# Altium PCB Visual_acqusation.PcbDoc
Units mm, origin at the board's own origin, x right, y up, seen from the top; angles counter-clockwise.
Board outline 40 x 40 mm, 2 copper layers (Top Layer, Bottom Layer), stack 1.671 mm thick; 53 components, 28 nets, 154 pads, 39 vias.
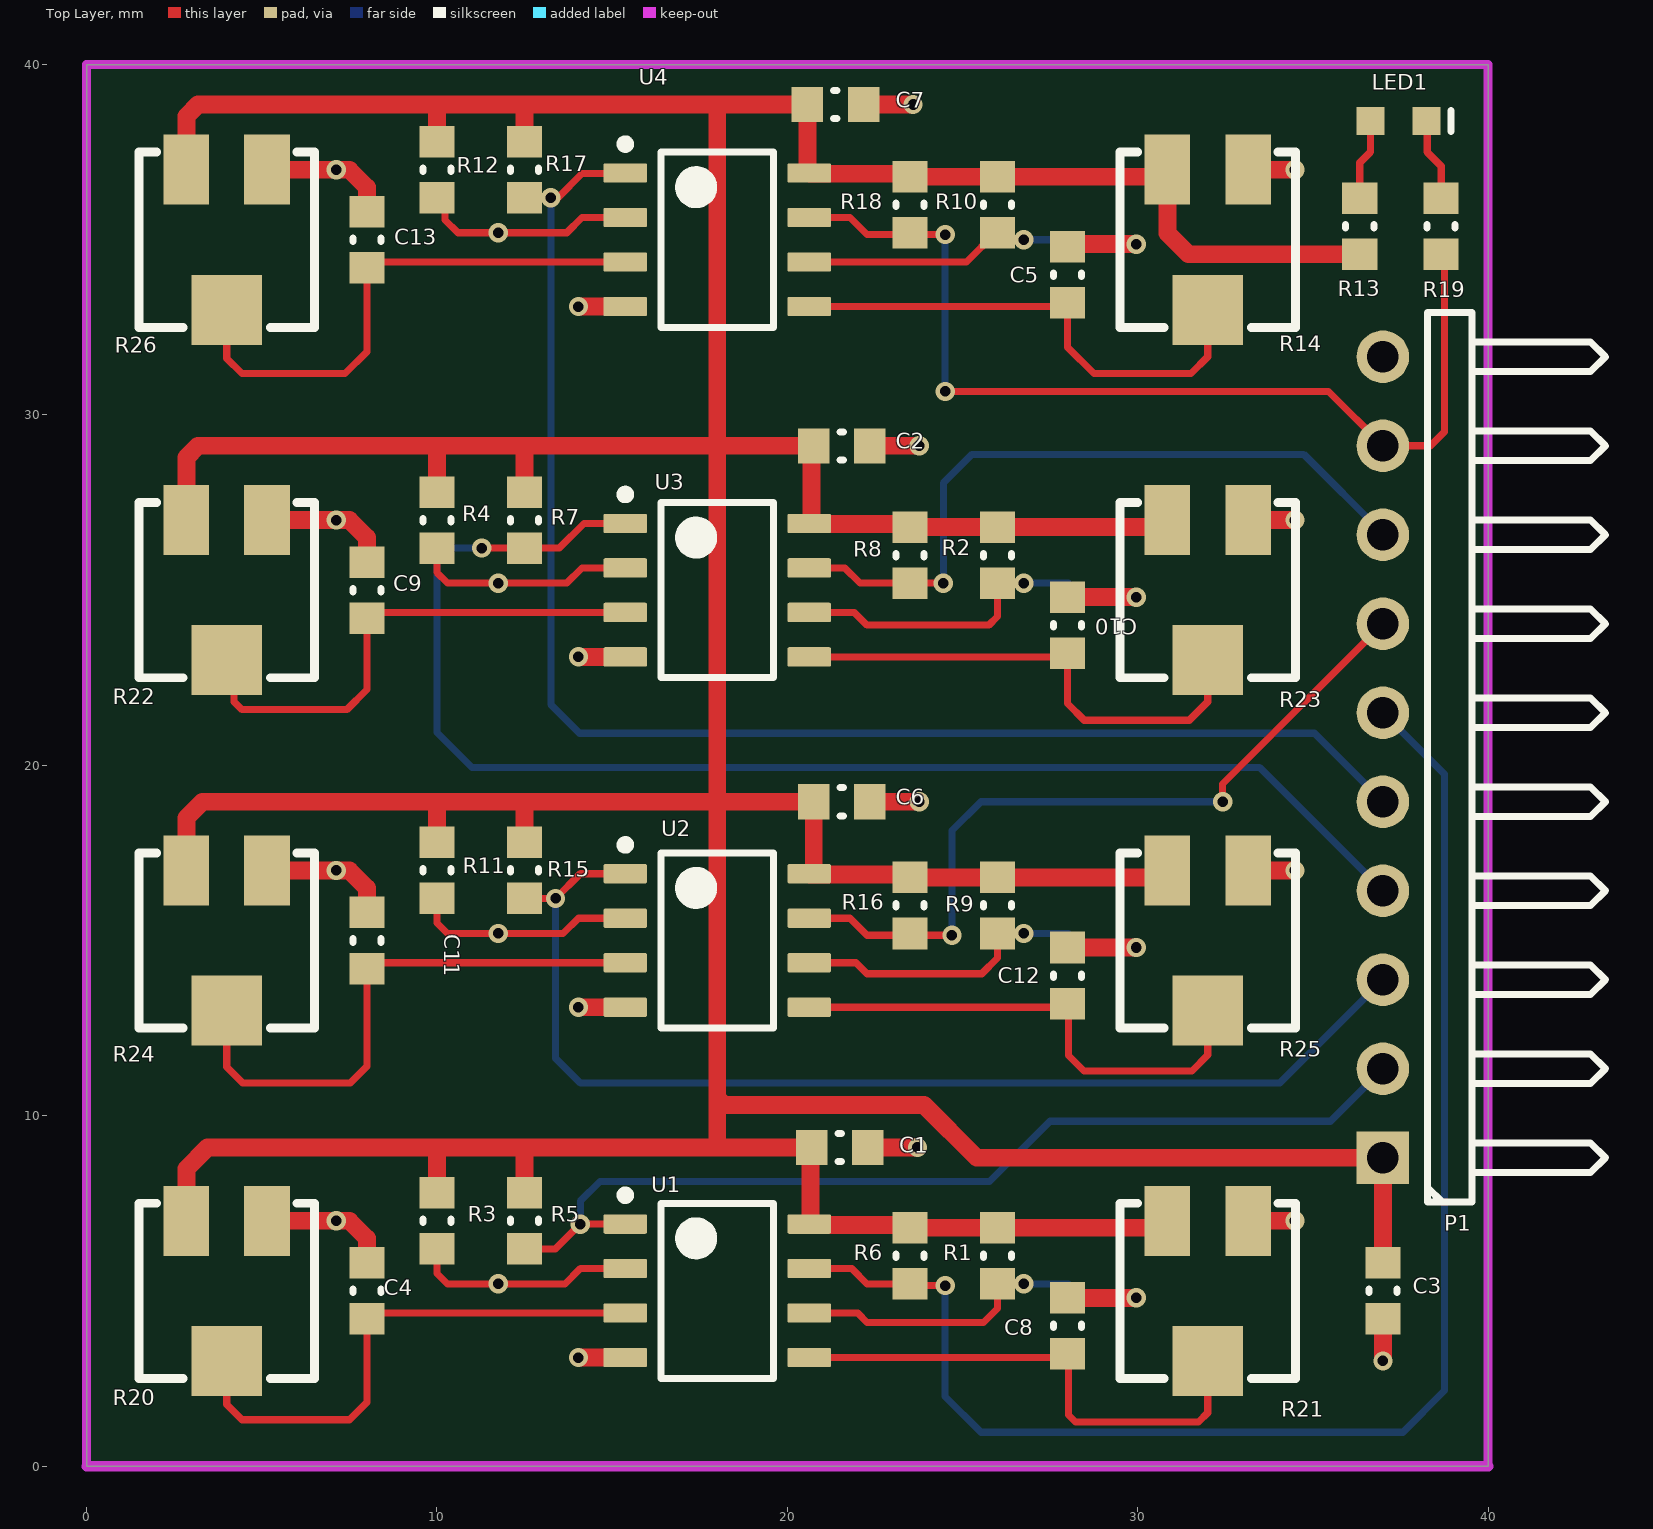
[diagram p0: Top Layer view]
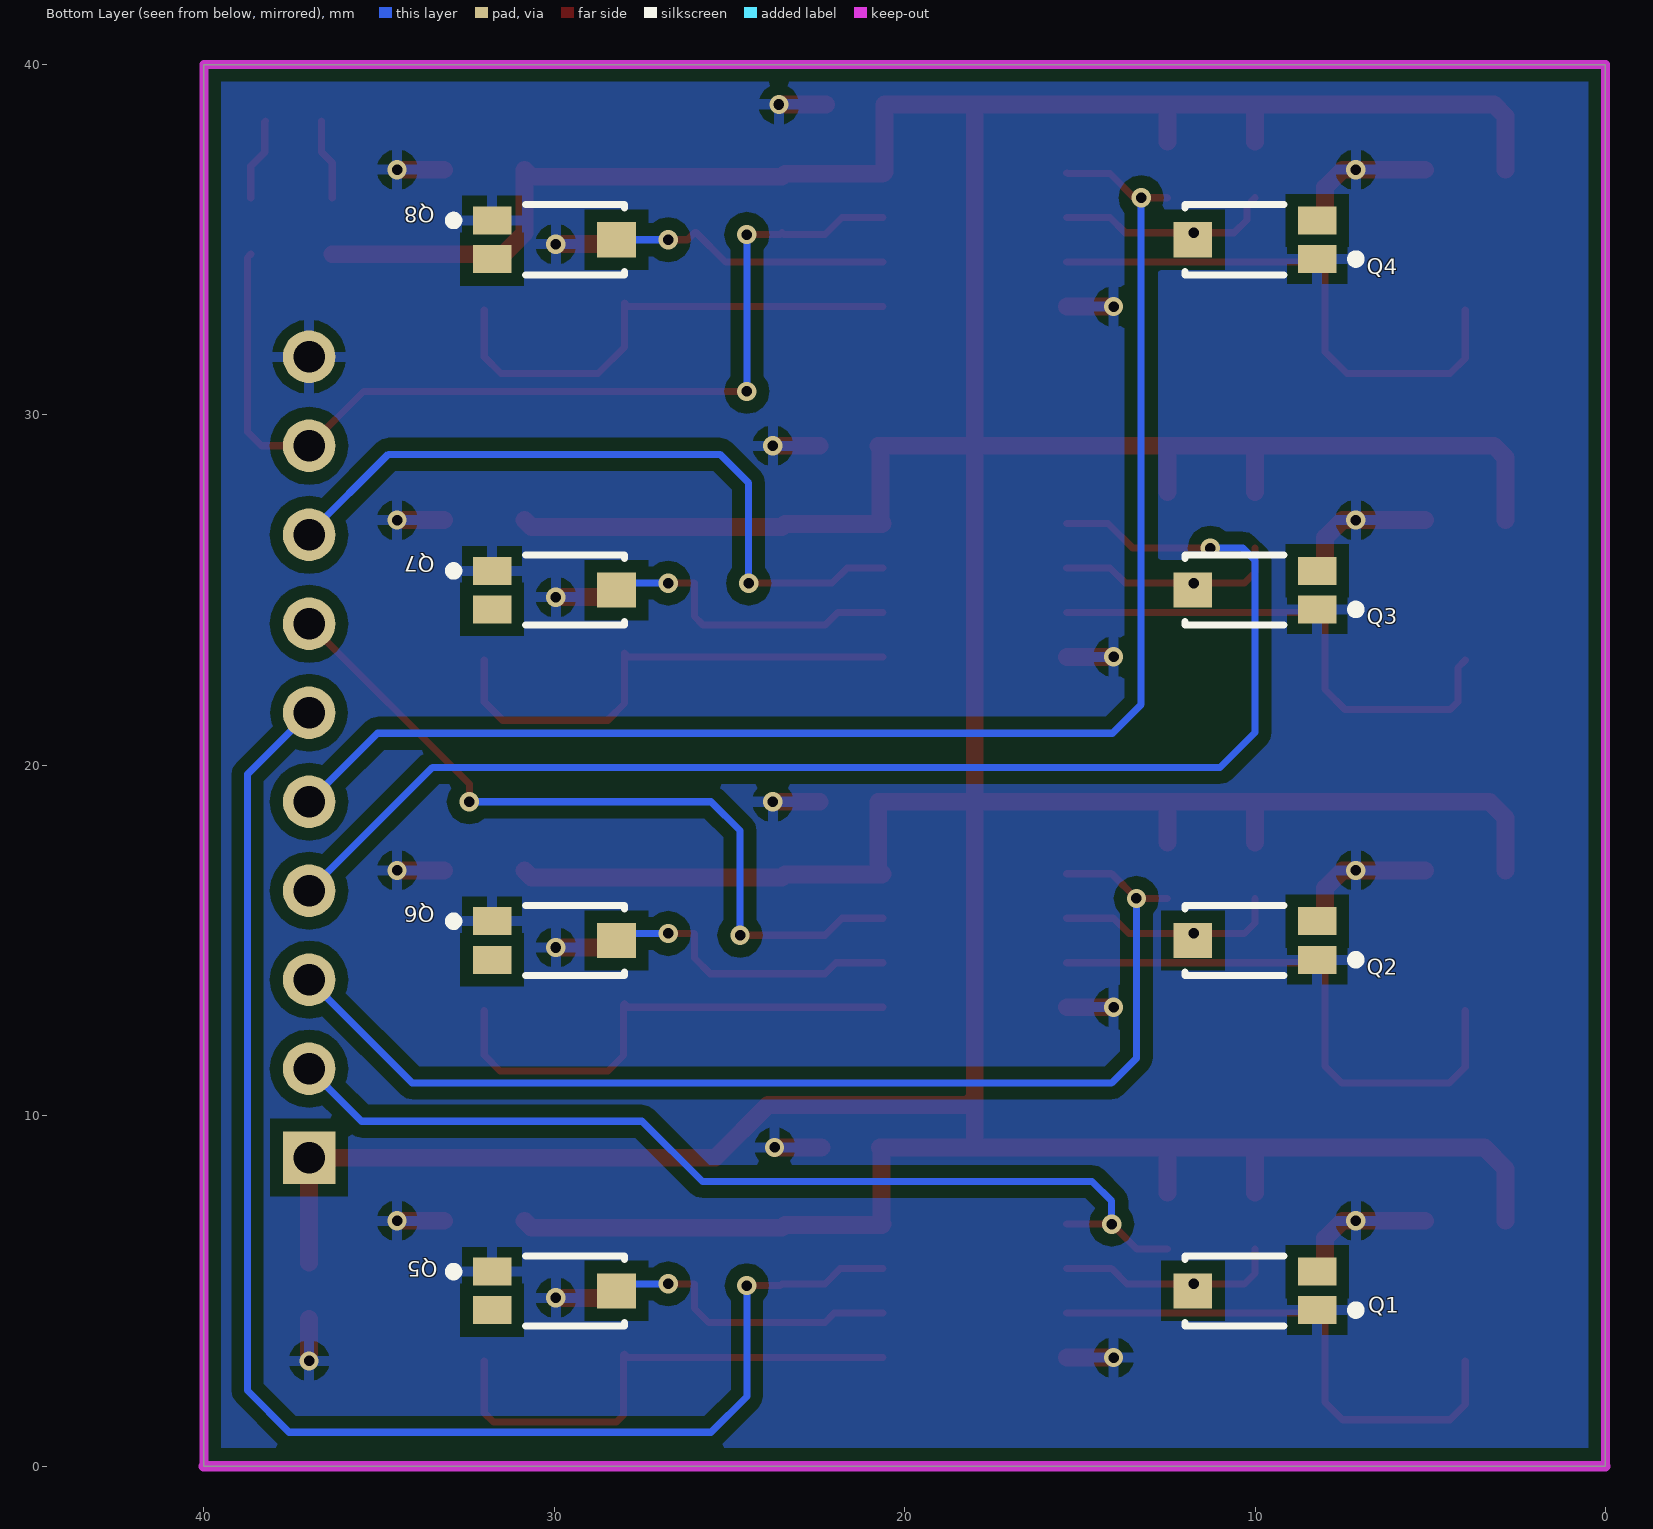
[diagram p1: Bottom Layer view, seen from below]

## Layer stack, top to bottom
Top Solder: solder mask 0.0102, Solder Resist, Dk 3.5
Top Layer: signal copper 0.0356
Dielectric1: core 1.6, FR-4, Dk 4.8
Bottom Layer: signal copper 0.0356
Bottom Solder: solder mask 0.0102, Solder Resist, Dk 3.5

## Board outline
0,0 40,0 40,40 0,40

## Design rules (kind name [scope] priority, off if disabled: settings)
Clearance Clearance_1 [InPolygon] p1: gap=0.356 ignorepadtopadclearanceinfootprint=FALSE except(0: Arc-Hole Track-Hole SMDPad-Hole THPad-Hole Via-Hole Fill-Hole Poly-Hole Region-Hole Text-Hole)
Clearance [All] p2: gap=0.152 ignorepadtopadclearanceinfootprint=FALSE except(0: Arc-Hole Track-Hole SMDPad-Hole THPad-Hole Via-Hole Fill-Hole Poly-Hole Region-Hole Text-Hole)
FabricationTestPointUsage TestPointUsage [All] p1: valid=0 allowmultiple=FALSE
FabricationTestpoint Testpoint [(IsPad And (OnTopLayer Or OnBottomLayer))] p1: side=3 testpointundercomponent=TRUE minsize=1.016 maxsize=2.54 preferedsize=1.524 minholesize=0 maxholesize=1.016 preferedholesize=0.813 testpointgrid=0.025 allowsidetop=TRUE allowsidebottom=TRUE usegrid=TRUE gridtolerance=0
HoleSize [All] p1: absolutevalues=TRUE maxlimit=20 minlimit=0.3 maxpercent=80.000 minpercent=20.000
HoleToHoleClearance [All] p1: gap=0 allowstackedmicrovias=TRUE
MinimumSolderMaskSliver [All] p1: minsoldermaskwidth=0
PlaneClearance [All] p1: clearance=0.4
PlaneConnect [All] p1: planeconnectstyle=Direct reliefexpansion=0.3 reliefentries=4 reliefconductorwidth=0.3 reliefairgap=0.3
PolygonConnect [All] p1: connectstyle=Relief reliefconductorwidth=0.3 reliefentries=4 polygonreliefangle="90 Angle" airgapwidth=0.3
RoomDefinition Detector [InComponentClass('Detector')] p1: confinementstyle=ConfineIn formatcopy=TRUE lockcomponents=FALSE outline -105.241,-83.793 -54.441,-83.793 -54.441,-58.393 -105.241,-58.393
RoutingVias [All] p1: holewidth=0.5 width=1.3 viastyle="Through Hole" minholewidth=0.3 minwidth=0.5 maxholewidth=10 maxwidth=20
SilkToSilkClearance [All] p1: silktosilkclearance=0
SilkToSolderMaskClearance SilkscreenOverComponentPads [IsPad] p1: minsilkscreentomaskgap=0 clearancetoexposedcopper=TRUE
SolderMaskExpansion [All] p1: expansion=0.102 istentingtop=FALSE
Width [All] p1: maxlimit=5.08 minlimit=0.152 preferedwidth=0.254
21 further rules are at their usual default settings.

## Components (designator, comment, footprint, x,y, rotation, side; value= is the part's Value field where it differs from the comment)
C1 "CAP 100nF 6.3V" CAPC0603(1608)100_N 21.502,9.092 r180 top value=100nF
C2 "CAP 100nF 6.3V" CAPC0603(1608)100_N 21.552,29.12 r180 top value=100nF
C3 "CAP 100nF 6.3V" CAPC0603(1608)100_N 37,5 r90 top value=100nF
C4 "CAP 100nF 6.3V" CAPC0603(1608)100_N 8,5 r270 top value=100nF
C5 "CAP 100nF 6.3V" CAPC0603(1608)100_N 28,34 r270 top value=100nF
C6 "CAP 100nF 6.3V" CAPC0603(1608)100_N 21.552,18.96 r180 top value=100nF
C7 "CAP 100nF 6.3V" CAPC0603(1608)100_N 21.375,38.861 r180 top value=100nF
C8 "CAP 100nF 6.3V" CAPC0603(1608)100_N 28,4 r270 top value=100nF
C9 "CAP 100nF 6.3V" CAPC0603(1608)100_N 8,25 r270 top value=100nF
C10 "CAP 100nF 6.3V" CAPC0603(1608)100_N 28,24 r270 top locked value=100nF
C11 "CAP 100nF 6.3V" CAPC0603(1608)100_N 8,15 r270 top value=100nF
C12 "CAP 100nF 6.3V" CAPC0603(1608)100_N 28,14 r270 top value=100nF
C13 "CAP 100nF 6.3V" CAPC0603(1608)100_N 8,35 r270 top value=100nF
LED1 "150060BS75000" 0603_A 37.44,38.386 r180 top
P1 "Header 10H" HDR1X10H 37,8.8 r90 top locked
Q1 "TEMT6000X01" VSIL-TEMT6000X01_V 10,5 r0 bottom locked
Q2 "TEMT6000X01" VSIL-TEMT6000X01_V 10,15 r0 bottom locked
Q3 "TEMT6000X01" VSIL-TEMT6000X01_V 10,25 r0 bottom locked
Q4 "TEMT6000X01" VSIL-TEMT6000X01_V 10,35 r0 bottom locked
Q5 "TEMT6000X01" VSIL-TEMT6000X01_V 30,5 r180 bottom
Q6 "TEMT6000X01" VSIL-TEMT6000X01_V 30,15 r180 bottom
Q7 "TEMT6000X01" VSIL-TEMT6000X01_V 30,25 r180 bottom locked
Q8 "TEMT6000X01" VSIL-TEMT6000X01_V 30,35 r180 bottom
R1 "10K 1% 0603(1608)" RESC0603(1608)_N 26,6 r90 top value="10000.00 Ohm"
R2 "10K 1% 0603(1608)" RESC0603(1608)_N 26,26 r90 top value="10000.00 Ohm"
R3 "10K 1% 0603(1608)" RESC0603(1608)_N 10,7 r90 top value="10000.00 Ohm"
R4 "10K 1% 0603(1608)" RESC0603(1608)_N 10,27 r90 top value="10000.00 Ohm"
R5 "1K 1% 0603(1608)" RESC0603(1608)_N 12.5,7 r90 top value="3300.00 Ohm"
R6 "3K3 1% 0603(1608)" RESC0603(1608)_N 23.5,6 r90 top value="3300.00 Ohm"
R7 "1K 1% 0603(1608)" RESC0603(1608)_N 12.5,27 r90 top value="3300.00 Ohm"
R8 "3K3 1% 0603(1608)" RESC0603(1608)_N 23.5,26 r90 top value="3300.00 Ohm"
R9 "10K 1% 0603(1608)" RESC0603(1608)_N 26,16 r90 top value="10000.00 Ohm"
R10 "10K 1% 0603(1608)" RESC0603(1608)_N 26,36 r90 top value="10000.00 Ohm"
R11 "10K 1% 0603(1608)" RESC0603(1608)_N 10,17 r90 top value="10000.00 Ohm"
R12 "10K 1% 0603(1608)" RESC0603(1608)_N 10,37 r90 top value="10000.00 Ohm"
R13 "1K 1%" RESC0603(1608)_N 36.338,35.388 r270 top value="1000.00 Ohm"
R14 "RPot SM" POT4MM-2 32,35 r270 top
R15 "1K 1% 0603(1608)" RESC0603(1608)_N 12.5,17 r90 top value="3300.00 Ohm"
R16 "3K3 1% 0603(1608)" RESC0603(1608)_N 23.5,16 r90 top value="3300.00 Ohm"
R17 "1K 1% 0603(1608)" RESC0603(1608)_N 12.5,37 r90 top value="3300.00 Ohm"
R18 "3K3 1% 0603(1608)" RESC0603(1608)_N 23.5,36 r90 top value="3300.00 Ohm"
R19 "0" RESC0603(1608)_N 38.664,35.388 r90 top value="1000.00 Ohm"
R20 "RPot SM" POT4MM-2 4,5 r270 top
R21 "RPot SM" POT4MM-2 32,5 r270 top
R22 "RPot SM" POT4MM-2 4,25 r270 top
R23 "RPot SM" POT4MM-2 32,25 r270 top
R24 "RPot SM" POT4MM-2 4,15 r270 top
R25 "RPot SM" POT4MM-2 32,15 r270 top
R26 "RPot SM" POT4MM-2 4,35 r270 top
U1 "LM393M" D0008A_L 18,5 r0 top
U2 "LM393M" D0008A_L 18,15 r0 top locked
U3 "LM393M" D0008A_L 18,25 r0 top locked
U4 "LM393M" D0008A_L 18,35 r0 top locked

## Footprints (in the part's own frame and the unit in brackets; to place one, negate y for a bottom-side part, rotate by r counter-clockwise, add the part's x,y. Pads: shape width x height; smd on the part's side, far side on the other; paste and mask are expansions set on the pad)
0603_A [mm] "Chip LED, 2-Leads, Body 1.6x0.8mm, IPC Medium Density"
  rect 0.8x0.8 smd: 1(-0.8,0) 2(0.8,0)
  silkscreen extent -1.5,-0.3 -1.5,0.3, body extent -0.8,-0.4 0.8,0.4, height 0.7
CAPC0603(1608)100_N [mm] "Chip Capacitor, Body 1.6x0.8mm, Height 1.0mm, IPC Medium Density"
  rect 0.9x1 smd: 1(-0.8,0) 2(0.8,0)
  silkscreen extent -0.05,-0.4 0.05,0.4, body extent -0.87,-0.48 0.88,0.47, height 1
D0008A_L [mm] "SOIC, 8-Leads, Body 5x4mm, Pitch 1.27mm, IPC High Density"
  rrect18% 1.25x0.55 smd: 1(-2.625,1.905) 2(-2.625,0.635) 3(-2.625,-0.635) 4(-2.625,-1.905) 5(2.625,-1.905) 6(2.625,-0.635) 7(2.625,0.635) 8(2.625,1.905)
  silkscreen extent -2.75,-2.5 1.6,2.85, body extent -3,-2.45 3,2.45, height 1.63
HDR1X10H [mm] "Connector; Header; 10 Position; Right Angle"
  rect 1.5x1.5 hole 0.9: 1(0,0)
  round 1.5 hole 0.9: 2(2.54,0) 3(5.08,0) 4(7.62,0) 5(10.16,0) 6(12.7,0) 7(15.24,0) 8(17.78,0) 9(20.32,0) 10(22.86,0)
  silkscreen extent -1.27,-6.35 24.13,-1.27
POT4MM-2 [mm] "Square Trimming Potentiometer"
  rect 2x1.3 smd: CCW(-2,-1.15) CW(-2,1.15)
  rect 2x2 smd: W(2,0)
  silkscreen extent -2.5,-2.5 2.5,2.5
RESC0603(1608)_N [mm] "Chip Resistor, Body 1.6x0.8mm, IPC Medium Density"
  rect 0.9x1 smd: 1(-0.8,0) 2(0.8,0)
  silkscreen extent -0.05,-0.4 0.05,0.4, body extent -0.85,-0.47 0.85,0.47, height 0.6
VSIL-TEMT6000X01_V [mm] "SMD, 3-Leads, Body 4x2mm"
  rect 1.1x0.8 smd: 1(-1.775,0.55) 2(-1.775,-0.55)
  rect 1.1x1 smd: 3(1.775,0)
  silkscreen extent -3,-1 2,1, body extent -2,-1 2,1, height 1.05

## Part data
C1 C2 C3 C4 C5 C6 C7 C8 C9 C10 C11 C12 C13: library part CMP-1035-02576-1, "CAP 100nF 6.3V ±10% 0603 (1608 Metric) Thickness 1mm SMD", Case-EIA=0603, Case-Metric=1608, Rated Voltage="6.3 V", Tolerance=Â±10%, Max Thickness="1 mm", Technology=SMT
LED1: library part CMP-1426-00003-1, "SMD mono-color Chip LED, WL-SMCW, Blue", Color=Blue, Manufacturer="Wuerth Elektronik", ComponentLink1Description="Manufacturer URL", ComponentLink1URL=http://www.we-online.com, ComponentLink2Description=Datasheet, ComponentLink2URL=http://katalog.we-online.com/led/datasheet/150060BS75000.pdf, PackageReference=0603_A, PartNumber=150060BS75000
P1: "Header, 10-Pin, Right Angle", LatestRevisionDate=17-Jul-2002, LatestRevisionNote="Re-released for DXP Platform.", Publisher="Altium Limited"
Q1 Q2 Q3 Q5 Q6 Q7 Q8: library part CMP-1666-00035-1, "Ambient Light Sensor / , 100 mW, -40 to 100 degC, 3-Pin SMD, RoHS, Tape and Reel", Case Code (Imperial)=0603, Case Code (Metric)=1608, Colour=Red, Forward Current="20 mA", Forward Voltage="2 V", Max Operating Temperature="85 degC", Min Operating Temperature="-55 degC", Package Quantity=3000, Power Rating="75 mW", Case\Package=0603, ComponentLink1Description="Manufacturer URL", ComponentLink1URL=http://www.vishay.com/, ComponentLink2Description=Datasheet, ComponentLink2URL=http://www.vishay.com/docs/81579/temt6000.pdf, DatasheetVersion="Rev. 1.9, 08/2011", Height="0.8 mm", Illumination Colour=Red, Length="1.6 mm", Lens Style=Diffused, Luminous Intensity="54 mcd", Mount="Surface Mount", Nominal Vf="2 V", PackageDescription="3-Pin Surface Mount Device, Body 4 x 2 mm", PackageReference=1206, Packaging="Tape and Reel", Pins=2, Radiation Hardening=No, RoHSCompliant=true, Viewing Angle="130 degrees", Width="0.8 mm"
Q4: library part CMP-1666-00035-1, "Ambient Light Sensor / , 100 mW, -40 to 100 degC, 3-Pin SMD, RoHS, Tape and Reel", Case\Package=0603, Case Code (Metric)=1608, Colour=Red, Forward Current="20 mA", Forward Voltage="2 V", Max Operating Temperature="85 degC", Min Operating Temperature="-55 degC", Package Quantity=3000, Power Rating="75 mW", Case Code (Imperial)=0603, ComponentLink1Description="Manufacturer URL", ComponentLink1URL=http://www.vishay.com/, ComponentLink2Description=Datasheet, ComponentLink2URL=http://www.vishay.com/docs/81579/temt6000.pdf, DatasheetVersion="Rev. 1.9, 08/2011", Height="0.8 mm", Illumination Colour=Red, Length="1.6 mm", Lens Style=Diffused, Luminous Intensity="54 mcd", Mount="Surface Mount", Nominal Vf="2 V", PackageDescription="3-Pin Surface Mount Device, Body 4 x 2 mm", PackageReference=1206, Packaging="Tape and Reel", Pins=2, Radiation Hardening=No, RoHSCompliant=true, Viewing Angle="130 degrees", Width="0.8 mm"
R1 R2 R3 R4 R9 R10 R11 R12: library part CMP-1012-00623-1, "10K 0.1W 1% 0603 (1608 Metric)  SMD", Case-EIA=0603, Case-Metric=1608, Power="0.1 W", Tolerance="1 %", Technology=SMT
R5 R6 R7 R8 R15 R16 R17 R18: library part CMP-1012-00567-1, "3K3 0.1W 1% 0603 (1608 Metric)  SMD", Case-EIA=0603, Case-Metric=1608, Power="0.1 W", Tolerance="1 %", Technology=SMT
R13 R19: library part CMP-1012-00510-1, "1K 0.1W 1% 0603 (1608 Metric)  SMD", Case-EIA=0603, Case-Metric=1608, Power="0.1 W", Tolerance="1 %", Technology=SMT
R14 R20 R21 R22 R23 R24 R25 R26: "Square Trimming Potentiometer", ComponentLink1Description="Manufacturer Link", ComponentLink1URL=http://bourns.com/2/search.html, DatasheetVersion=Oct-2003, PackageDescription="Square Trimming Potentiometer", PackageReference=POT4MM-2, Published=17-Dec-2003, Publisher="Altium Limited"
U1 U2 U3 U4: library part CMP-0055-00682-3, "Low Power Low Offset Voltage Dual Comparator, 8-pin Narrow SOIC", Manufacturer="Texas Instruments", Package Reference=D0008A, PackageTopMarking=NSZXTT*LM*393M, PowerWise=N, Code_IPC=SOIC127P600-8, Code_JEDEC=MS-012-AA, ComponentLink1Description="Datasheet URL", ComponentLink1URL=http://www.ti.com/general/docs/lit/getliterature.tsp?genericPartNumber=LM393-N&fileType=pdf, CompType=Amplifiers, PackageDescription="SOIC Narrow, 4.9 x 3.9 x 1.45mm, 8 Lead, 1.27mm Pitch", PinCount=8, RoHS=N

## Via types
v1: diameter 0.55, hole 0.3, Top Layer to Bottom Layer, tented both sides, 39 vias

## Nets (pads, with @x,y where several pads share a name; then routed paths per layer and width w, separated by ;. In a path a pad name is that pad's centre, name@x,y a point inside that pad or via, vN(x,y) a via of type N, cw(c..) or ccw(c..) an arc to the next point about the centre after c; other vN are vias at no path point)
+5: C1.2 C2.2 C3.2 C6.2 C7.2 P1.1 R1.2 R2.2 R3.2 R4.2 R5.2 R6.2 R7.2 R8.2 R9.2 R10.2 R11.2 R12.2 R13.2 R14.CCW R15.2 R16.2 R17.2 R18.2 R20.CCW R21.CCW R22.CCW R23.CCW R24.CCW R25.CCW R26.CCW U1.8 U2.8 U3.8 U4.8 | length 198.2
  Top Layer w0.508: R20.CCW 2.85,8.488 3.454,9.092 10,9.092 ; R24.CCW 2.85,18.5 3.31,18.96 10,18.96 ; R22.CCW 2.85,28.788 3.182,29.12 10,29.12 ; R26.CCW 2.85,38.528 3.182,38.861 10,38.861 ; R3.2 10,9.092 ; R11.2 10,18.96 ; R4.2 10,29.12 ; R12.2 10,38.861 ; R5.2 12.5,9.092 ; R15.2 12.5,18.96 ; R7.2 12.5,29.12 ; R17.2 12.5,38.861 ; R21.CCW 30.65,6.8 R1.2 R6.2 23.416,6.884 20.646,6.884 U1.8 20.642,6.905 20.663,6.926 20.663,9.054 C1.2 18,9.092 ; R25.CCW 30.65,16.8 R9.2 R16.2 23.416,16.884 20.646,16.884 U2.8 20.731,16.905 20.752,16.926 C6.2 18,18.96 ; R23.CCW 30.65,26.8 R2.2 R8.2 23.416,26.884 20.646,26.884 U3.8 20.667,26.905 20.688,26.926 20.688,29.057 C2.2 18,29.12 ; R13.2 31.448,34.588 30.85,35.186 R14.CCW 30.65,36.8 R10.2 R18.2 23.416,36.884 20.646,36.884 U4.8 20.596,36.905 20.575,36.926 C7.2 18,38.861 ; C3.2 P1.1 25.405,8.8 23.9,10.305 18.201,10.305 18,10.505 ; 10,9.092 12.5,9.092 ; 10,18.96 12.5,18.96 ; 10,29.12 12.5,29.12 ; 10,38.861 12.5,38.861 ; 12.5,9.092 18,9.092 ; 12.5,18.96 18,18.96 ; 12.5,29.12 18,29.12 ; 12.5,38.861 18,38.861 ; 18,9.092 18,10.505 ; 18,10.505 18,18.96 ; 18,18.96 18,29.12 ; 18,29.12 18,38.861
GND: C1.1 C2.1 C3.1 C4.1 C5.1 C6.1 C7.1 C8.1 C9.1 C10.1 C11.1 C12.1 C13.1 P1.10 Q1.1 Q2.1 Q3.1 Q4.1 Q5.1 Q6.1 Q7.1 Q8.1 R14.CW R20.CW R21.CW R22.CW R23.CW R24.CW R25.CW R26.CW U1.4 U2.4 U3.4 U4.4 | length 40.1
  Top Layer w0.508: R20.CW 7.5,7 8,6.5 C4.1 ; R24.CW 7.5,17 8,16.5 C11.1 ; R22.CW 7.5,27 8,26.5 C9.1 ; R26.CW 7.5,37 8,36.5 C13.1 ; v1(14.037,3.095) U1.4 ; v1(14.037,13.095) U2.4 ; v1(14.037,23.095) U3.4 ; v1(14.037,33.095) U4.4 ; C7.1@22.25,38.861 v1(23.588,38.861) ; C1.1@22.377,9.092 v1(23.715,9.092) ; C6.1@22.427,18.96 v1(23.765,18.96) ; C2.1@22.427,29.12 v1(23.765,29.12) ; C8.1 v1(29.956,4.8) ; C12.1 v1(29.956,14.8) ; C10.1 v1(29.956,24.8) ; C5.1 28.075,34.875 v1(29.956,34.875) ; R21.CW v1(34.488,7) ; R25.CW v1(34.488,17) ; R23.CW v1(34.488,27) ; R14.CW v1(34.488,37) ; v1(37,3) C3.1
  other v1: 7.125,7 7.125,17 7.125,27 7.125,37
LED: P1.9 R18.1 R19.1 U4.7 | length 28.8
  Top Layer w0.203: U4.7 21.79,35.635 22.275,35.15 23.45,35.15 R18.1 23.55,35.15 v1(24.504,35.15) ; v1(24.504,30.672) 35.448,30.672 P1.9 38.355,29.12 38.755,29.52 38.755,34.496 R19.1
  Bottom Layer w0.203: v1(24.504,30.672) v1(24.504,35.15)
NetC4_2: C4.2 R20.W U1.3 | length 15.5
  Top Layer w0.203: R20.W 4,1.754 4.431,1.323 7.504,1.323 8,1.819 C4.2 8.165,4.365 U1.3
NetC5_2: C5.2 R14.W U4.5 | length 14.5
  Top Layer w0.203: U4.5 27.895,33.095 C5.2 28,31.931 28.75,31.181 31.521,31.181 32,31.66 R14.W
NetC8_2: C8.2 R21.W U1.5 | length 14.8
  Top Layer w0.203: U1.5 27.895,3.095 C8.2 28.025,3.175 28.025,1.455 28.225,1.255 31.734,1.255 32,1.521 R21.W
NetC9_2: C9.2 R22.W U3.3 | length 14.9
  Top Layer w0.203: R22.W 4.205,22.795 4.205,21.814 4.431,21.588 7.426,21.588 8,22.163 C9.2 8.165,24.365 U3.3
NetC10_2: C10.2 R23.W U3.5 | length 14.5
  Top Layer w0.203: U3.5 27.895,23.095 C10.2 28,21.763 28.475,21.288 31.474,21.288 32,21.814 R23.W
NetC11_2: C11.2 R24.W U2.3 | length 16.2
  Top Layer w0.203: R24.W 4,11.392 4.457,10.935 7.524,10.935 8,11.411 C11.2 8.165,14.365 U2.3
NetC12_2: C12.2 R25.W U2.5 | length 14.5
  Top Layer w0.203: U2.5 27.895,13.095 C12.2 28.025,13.175 28.025,11.718 28.465,11.279 31.55,11.279 32,11.729 R25.W
NetC13_2: C13.2 R26.W U4.3 | length 15.7
  Top Layer w0.203: R26.W 4,31.612 4.431,31.181 7.378,31.181 8,31.803 C13.2 8.165,34.365 U4.3
NetLED1_1: LED1.1 R19.2 | length 2.4
  Top Layer w0.203: LED1.1 38.264,38.362 38.264,37.5 38.664,37.1 R19.2
NetLED1_2: LED1.2 R13.1 | length 2.3
  Top Layer w0.203: R13.1 36.338,37.198 36.64,37.5 LED1.2
NetP1_2: P1.2 R5.1 U1.1 | length 28.3
  Top Layer w0.203: R5.1 13.387,6.2 v1(14.092,6.905) U1.1
  Bottom Layer w0.203: v1(14.092,6.905) 14.092,7.563 14.65,8.121 25.773,8.121 27.494,9.842 35.502,9.842 P1.2
NetP1_3: P1.3 R15.1 U2.1 | length 32.9
  Top Layer w0.203: R15.1 v1(13.387,16.2) 14.092,16.905 U2.1
  Bottom Layer w0.203: v1(13.387,16.2) 13.387,11.64 14.092,10.935 34.055,10.935 P1.3
NetP1_4: P1.4 R7.1 U3.1 | length 39.6
  Top Layer w0.203: v1(11.275,26.2) R7.1 13.49,26.2 14.195,26.905 U3.1
  Bottom Layer w0.203: v1(11.275,26.2) 10.351,26.2 10,25.849 10,20.935 10.997,19.938 33.482,19.938 P1.4
NetP1_5: P1.5 R17.1 U4.1 | length 42.5
  Top Layer w0.203: R17.1 v1(13.25,36.2) 13.452,36.2 14.14,36.888 15.358,36.888 U4.1
  Bottom Layer w0.203: v1(13.25,36.2) 13.25,21.737 14.073,20.914 35.046,20.914 P1.5
NetP1_6: P1.6 R6.1 U1.7 | length 42.5
  Top Layer w0.203: U1.7 21.84,5.635 22.275,5.2 R6.1 23.55,5.15 v1(24.504,5.15)
  Bottom Layer w0.203: v1(24.504,5.15) 24.504,1.986 25.525,0.965 37.569,0.965 38.755,2.152 38.755,19.745 P1.6
NetP1_7: P1.7 R16.1 U2.7 | length 22.3
  Top Layer w0.203: U2.7 21.79,15.635 22.275,15.15 v1(24.7,15.15) ; v1(32.425,18.96) 32.425,19.465 P1.7
  Bottom Layer w0.203: v1(24.7,15.15) 24.7,18.135 25.525,18.96 v1(32.425,18.96)
NetP1_8: P1.8 R8.1 U3.7 | length 20.7
  Top Layer w0.203: U3.7 21.642,25.635 22.077,25.2 R8.1 v1(24.453,25.2)
  Bottom Layer w0.203: v1(24.453,25.2) 24.453,28.058 25.271,28.876 34.737,28.876 37,26.613 P1.8
NetQ1_3: Q1.3 R3.1 U1.2 | length 6.4
  Top Layer w0.203: R3.1 10,5.498 10.298,5.2 13.657,5.2 14.092,5.635 U1.2
  other v1: 11.75,5.2
NetQ2_3: Q2.3 R11.1 U2.2 | length 6.4
  Top Layer w0.203: R11.1 10,15.5 10.3,15.2 13.602,15.2 14.037,15.635 U2.2
  other v1: 11.75,15.2
NetQ3_3: Q3.3 R4.1 U3.2 | length 6.4
  Top Layer w0.203: R4.1 10,25.498 10.298,25.2 v1(11.75,25.2) 13.705,25.2 14.14,25.635 U3.2
NetQ4_3: Q4.3 R12.1 U4.2 | length 6.2
  Top Layer w0.203: R12.1 10.234,35.966 10.234,35.564 10.598,35.2 13.705,35.2 14.14,35.635 U4.2
  other v1: 11.75,35.2
NetQ5_3: Q5.3 R1.1 U1.6 | length 8.7
  Top Layer w0.203: U1.6 22.01,4.365 22.275,4.1 25.6,4.1 26,4.5 R1.1 v1(26.75,5.2)
  Bottom Layer w0.203: v1(26.75,5.2) 28.025,5.2 Q5.3
NetQ6_3: Q6.3 R9.1 U2.6 | length 8.7
  Top Layer w0.203: U2.6 21.96,14.365 22.275,14.05 25.55,14.05 26,14.5 R9.1 v1(26.75,15.2)
  Bottom Layer w0.203: v1(26.75,15.2) 28.025,15.2 Q6.3
NetQ7_3: Q7.3 R2.1 U3.6 | length 8.6
  Top Layer w0.203: U3.6 21.91,24.365 22.275,24 25.75,24 26,24.25 R2.1 v1(26.75,25.2)
  Bottom Layer w0.203: v1(26.75,25.2) Q7.3@28.025,25.2
NetQ8_3: Q8.3 R10.1 U4.6 | length 8
  Top Layer w0.203: U4.6 25.115,34.365 25.95,35.2 R10.1 26.2,35 v1(26.75,35)
  Bottom Layer w0.203: v1(26.75,35) Q8.3
pads on no net: Q1.2 Q2.2 Q3.2 Q4.2 Q5.2 Q6.2 Q7.2 Q8.2

## Polygon pours and split planes (outlines as drawn)
no net on Top Layer "NONET_L01_P004" (solid, pour order 4): 19.4,6.125
no net on Top Layer "Top Layer-No Net" (solid, pour order 0): 13.822,-22.517
GND on Bottom Layer "Top Layer-No Net1" (solid, remove dead copper, pour order 5): 0,0 40,0 40,40 0,40

## Keep-outs
Keep-Out Layer:
  the board outline again, w0.254